# EAGLE board big (EAGLE 6.4)
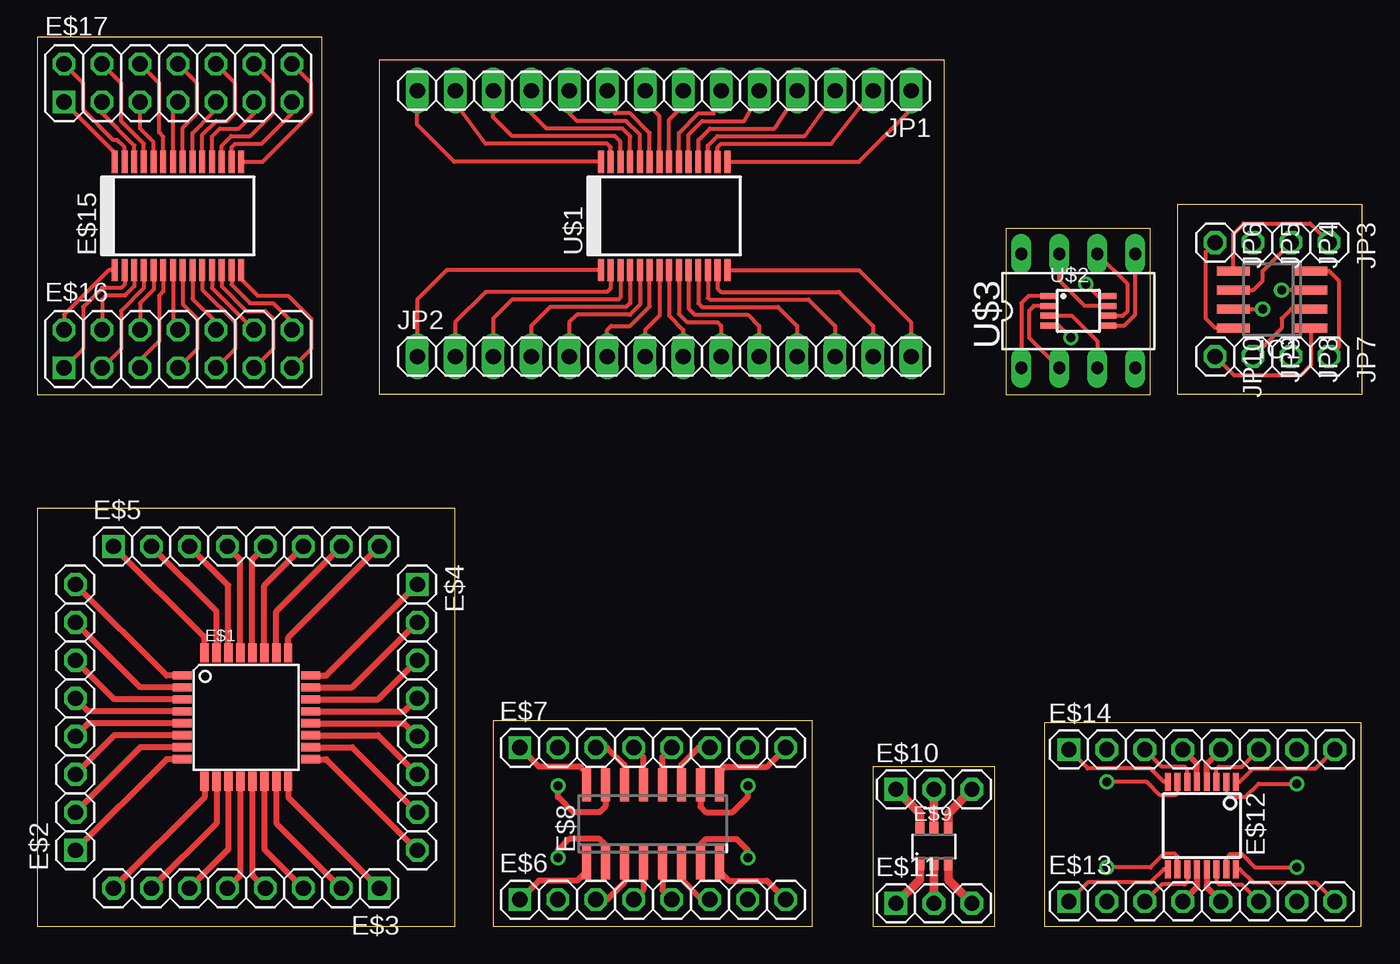
[diagram p0: board, top side]
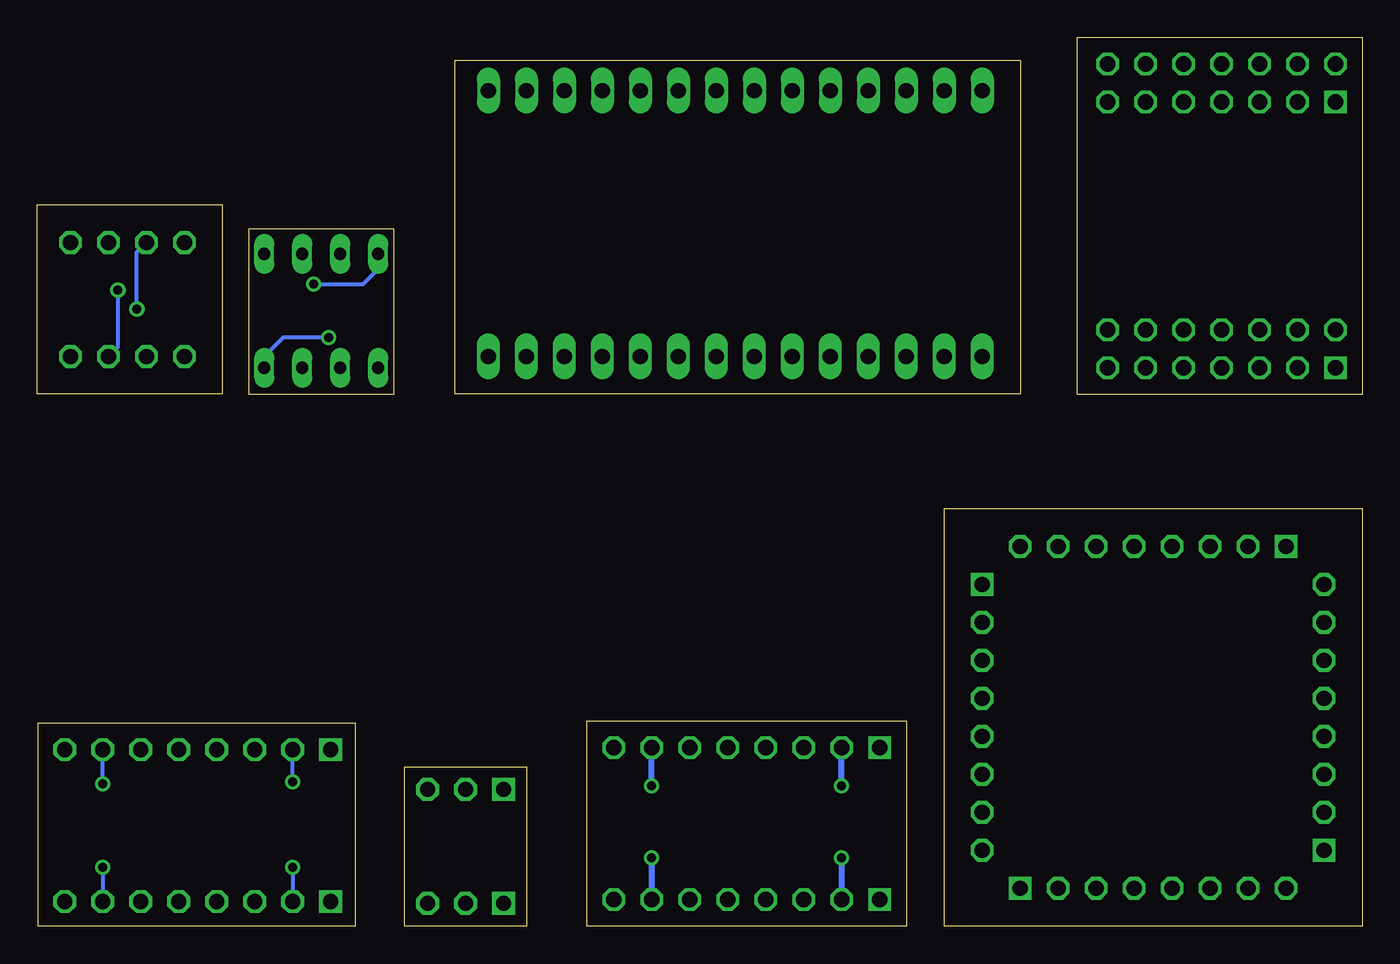
[diagram p1: board, bottom side, seen from below]

Size 88.57 x 59.44 mm. Coordinates in mm from the lower left corner, seen from the top.
Outline: 0,0 27.94,0 27.94,27.94 0,27.94 0,0
Outline: 30.48,0 51.82,0 51.82,13.72 30.48,13.72 30.48,0
Outline: 55.88,0 64.01,0 64.01,10.67 55.88,10.67 55.88,0
Outline: 67.31,0 88.52,0 88.52,13.59 67.31,13.59 67.31,0
Outline: 0,35.56 19.05,35.56 19.05,59.44 0,59.44 0,35.56
Outline: 22.86,57.91 22.86,35.58 60.63,35.58 60.63,57.91 22.86,57.91
Outline: 64.77,35.56 74.4,35.56 74.4,46.66 64.77,46.66 64.77,35.56
Outline: 76.2,48.26 76.2,35.58 88.57,35.58 88.57,48.26 76.2,48.26
Copper layers (1*16): Top 0.035mm / dielectric 1.5mm / Bottom 0.035mm
Design rules "default": minimum track width 10mil, minimum drill 24mil, track to track 8mil, track to pad 8mil, pad to pad 8mil, via to via 8mil, smd to smd 8mil, copper to edge 40mil, drill to drill 8mil, minimum pad ring 10mil, minimum via ring 8mil, stop-mask expansion 4mil, vias tented up to drill 0mil, thermal gap 10mil

## Footprints (pad centres in the part's own frame; a part is rotated, then mirrored left to right if it is on the bottom)
TQFP32-08 = smd 1.27 x 0.559: 1 -4.293,2.8; 2 -4.293,2; 3 -4.293,1.2; 4 -4.293,0.4; 5 -4.293,-0.4; 6 -4.293,-1.2; 7 -4.293,-2; 8 -4.293,-2.8; 17 4.293,-2.8; 18 4.293,-2; 19 4.293,-1.2; 20 4.293,-0.4; 21 4.293,0.4; 22 4.293,1.2; 23 4.293,2; 24 4.293,2.8 | smd 0.559 x 1.27: 9 -2.8,-4.293; 10 -2,-4.293; 11 -1.2,-4.293; 12 -0.4,-4.293; 13 0.4,-4.293; 14 1.2,-4.293; 15 2,-4.293; 16 2.8,-4.293; 25 2.8,4.293; 26 2,4.293; 27 1.2,4.293; 28 0.4,4.293; 29 -0.4,4.293; 30 -1.2,4.293; 31 -2,4.293; 32 -2.8,4.293
1X08-S = drill 1.016 square: 1 -8.89,0 | drill 1.016 octagon: 2 -6.35,0; 3 -3.81,0; 4 -1.27,0; 5 1.27,0; 6 3.81,0; 7 6.35,0; 8 8.89,0
SO-16 = smd 0.6 x 2.2: 1 -4.445,-2.917; 2 -3.175,-2.917; 3 -1.905,-2.917; 4 -0.635,-2.917; 5 0.635,-2.917; 6 1.905,-2.917; 7 3.175,-2.917; 8 4.445,-2.917; 9 4.445,2.283; 10 3.175,2.283; 11 1.905,2.283; 12 0.635,2.283; 13 -0.635,2.283; 14 -1.905,2.283; 15 -3.175,2.283; 16 -4.445,2.283
SOT23-6 = smd 0.6 x 0.9: 1 -0.95,-1.15; 2 0,-1.15; 3 0.95,-1.15; 4 0.95,1.15; 5 0,1.15; 6 -0.95,1.15
1X03-S = drill 1.016 square: 1 -2.54,0 | drill 1.016 octagon: 2 0,0; 3 2.54,0
SSOP16 = smd 0.4 x 1.2: 1 -2.275,-2.925; 2 -1.625,-2.925; 3 -0.975,-2.925; 4 -0.325,-2.925; 5 0.325,-2.925; 6 0.975,-2.925; 7 1.625,-2.925; 8 2.275,-2.925; 9 2.275,2.925; 10 1.625,2.925; 11 0.975,2.925; 12 0.325,2.925; 13 -0.325,2.925; 14 -0.975,2.925; 15 -1.625,2.925; 16 -2.275,2.925
SSOP28 = smd 0.4 x 1.5: 1 -4.225,-3.625; 2 -3.575,-3.625; 3 -2.925,-3.625; 4 -2.275,-3.625; 5 -1.625,-3.625; 6 -0.975,-3.625; 7 -0.325,-3.625; 8 0.325,-3.625; 9 0.975,-3.625; 10 1.625,-3.625; 11 2.275,-3.625; 12 2.925,-3.625; 13 3.575,-3.625; 14 4.225,-3.625; 15 4.225,3.625; 16 3.575,3.625; 17 2.925,3.625; 18 2.275,3.625; 19 1.625,3.625; 20 0.975,3.625; 21 0.325,3.625; 22 -0.325,3.625; 23 -0.975,3.625; 24 -1.625,3.625; 25 -2.275,3.625; 26 -2.925,3.625; 27 -3.575,3.625; 28 -4.225,3.625
2X07 = drill 1.016 square: 1 -7.62,-1.27 | drill 1.016 octagon: 2 -7.62,1.27; 3 -5.08,-1.27; 4 -5.08,1.27; 5 -2.54,-1.27; 6 -2.54,1.27; 7 0,-1.27; 8 0,1.27; 9 2.54,-1.27; 10 2.54,1.27; 11 5.08,-1.27; 12 5.08,1.27; 13 7.62,-1.27; 14 7.62,1.27
SO08 = smd 0.6 x 2.2: 1 -1.905,-2.6; 2 -0.635,-2.6; 3 0.635,-2.6; 4 1.905,-2.6; 5 1.905,2.6; 6 0.635,2.6; 7 -0.635,2.6; 8 -1.905,2.6
1X14 = drill 1.016 long: 1 -16.51,0; 2 -13.97,0; 3 -11.43,0; 4 -8.89,0; 5 -6.35,0; 6 -3.81,0; 7 -1.27,0; 8 1.27,0; 9 3.81,0; 10 6.35,0; 11 8.89,0; 12 11.43,0; 13 13.97,0; 14 16.51,0
1X01 = drill 1.016 octagon: 1 0,0
MSOP8 = smd 0.4 x 1: 1 -0.975,-2.05; 2 -0.325,-2.05; 3 0.325,-2.05; 4 0.975,-2.05; 5 0.975,2.05; 6 0.325,2.05; 7 -0.325,2.05; 8 -0.975,2.05
DIL8 = drill 0.813 long: 1 -3.81,-3.81; 2 -1.27,-3.81; 3 1.27,-3.81; 4 3.81,-3.81; 5 3.81,3.81; 6 1.27,3.81; 7 -1.27,3.81; 8 -3.81,3.81

## Placement (x,y rotation side)
E$1  [TQFP32-08]  13.97,13.97 0 top
E$2  [1X08-S]  2.54,13.97 90 top
E$3  [1X08-S]  13.97,2.54 180 top
E$4  [1X08-S]  25.4,13.97 270 top
E$5  [1X08-S]  13.97,25.4 0 top
E$6  [1X08-S]  41.15,1.78 0 top
E$7  [1X08-S]  41.15,11.94 0 top
E$8  [SO-16]  41.15,7.16 0 top
E$9  [SOT23-6]  59.94,5.33 0 top
E$10  [1X03-S]  59.94,9.14 0 top
E$11  [1X03-S]  59.94,1.52 0 top
E$12  [SSOP16]  77.85,6.73 180 top
E$13  [1X08-S]  77.85,1.65 0 top
E$14  [1X08-S]  77.85,11.81 0 top
E$15  [SSOP28]  9.4,47.5 0 top
E$16  [2X07]  9.4,38.61 0 top
E$17  [2X07]  9.4,56.39 0 top
IC1  UA741D  [SO08]  82.55,41.91 90 top
JP1  [1X14]  41.91,55.88 180 top
JP2  [1X14]  41.91,38.1 0 top
JP3  [1X01]  86.36,45.72 270 top
JP4  [1X01]  83.82,45.72 270 top
JP5  [1X01]  81.28,45.72 270 top
JP6  [1X01]  78.74,45.72 270 top
JP7  [1X01]  86.36,38.1 270 top
JP8  [1X01]  83.82,38.1 270 top
JP9  [1X01]  81.28,38.1 270 top
JP10  [1X01]  78.74,38.1 270 top
U$1  PIC18F26K20-SSOP  [SSOP28]  41.91,47.5 0 top
U$2  MCP3202-MSOP  [MSOP8]  69.6,41.15 270 top
U$3  MCP3202  [DIL8]  69.6,41.15 0 top

## Library data of the parts
E$1 = ref-packages-longpad
E$2-E$7 E$10 E$11 E$13 E$14 E$16 E$17 = pinhead-2
E$8 E$9 E$12 E$15 = _mcom4e
IC1 = linear
JP1-JP10 = pinhead
U$1-U$3 = _mcom3

## Nets
N$1: JP2.11 U$1.11
N$2: JP2.8 U$1.8
N$3: JP2.9 U$1.9
N$4: JP2.10 U$1.10
N$5: JP1.7 U$1.21
N$6: JP1.8 U$1.22
N$7: JP1.9 U$1.23
N$8: JP1.10 U$1.24
N$9: JP1.11 U$1.25
N$10: JP1.12 U$1.26
N$11: JP1.13 U$1.27
N$12: JP1.14 U$1.28
N$13: JP2.2 U$1.2
N$14: JP2.3 U$1.3
N$15: JP2.4 U$1.4
N$16: JP2.5 U$1.5
N$17: JP2.6 U$1.6
N$18: JP2.7 U$1.7
N$19: JP2.12 U$1.12
N$20: JP2.13 U$1.13
N$21: JP2.14 U$1.14
N$22: JP1.1 U$1.15
N$23: JP1.2 U$1.16
N$24: JP1.3 U$1.17
N$25: JP2.1 U$1.1
N$26: JP1.4 U$1.18
N$27: JP1.5 U$1.19
N$28: JP1.6 U$1.20
N$29: U$2.2 U$3.2
N$30: U$2.6 U$3.6
N$31: U$2.8 U$3.8
N$32: U$2.7 U$3.7
N$33: U$2.4 U$3.4
N$34: U$2.3 U$3.3
N$35: U$2.5 U$3.5
N$36: U$2.1 U$3.1
N$37: IC1.1 JP10.1
N$38: IC1.2 JP9.1
N$39: IC1.3 JP8.1
N$40: IC1.4 JP7.1
N$41: IC1.5 JP3.1
N$42: IC1.6 JP4.1
N$43: IC1.7 JP5.1
N$44: IC1.8 JP6.1
S$1: E$1.1 E$2.8
S$2: E$1.2 E$2.7
S$3: E$1.3 E$2.6
S$4: E$1.4 E$2.5
S$5: E$1.5 E$2.4
S$6: E$1.6 E$2.3
S$7: E$1.7 E$2.2
S$8: E$1.8 E$2.1
S$9: E$1.9 E$3.8
S$10: E$1.10 E$3.7
S$11: E$1.11 E$3.6
S$12: E$1.12 E$3.5
S$13: E$1.13 E$3.4
S$14: E$1.14 E$3.3
S$15: E$1.15 E$3.2
S$16: E$1.16 E$3.1
S$17: E$1.17 E$4.8
S$18: E$1.18 E$4.7
S$19: E$1.19 E$4.6
S$20: E$1.20 E$4.5
S$21: E$1.21 E$4.4
S$22: E$1.22 E$4.3
S$23: E$1.23 E$4.2
S$24: E$1.24 E$4.1
S$25: E$1.25 E$5.8
S$26: E$1.26 E$5.7
S$27: E$1.27 E$5.6
S$28: E$1.28 E$5.5
S$29: E$1.29 E$5.4
S$30: E$1.30 E$5.3
S$31: E$1.31 E$5.2
S$32: E$1.32 E$5.1
S$33: E$6.1 E$8.1
S$34: E$6.2 E$8.2
S$35: E$6.3 E$8.3
S$36: E$6.4 E$8.4
S$37: E$6.5 E$8.5
S$38: E$6.6 E$8.6
S$39: E$6.7 E$8.7
S$40: E$6.8 E$8.8
S$41: E$7.1 E$8.16
S$42: E$7.2 E$8.15
S$43: E$7.3 E$8.14
S$44: E$7.4 E$8.13
S$45: E$7.5 E$8.12
S$46: E$7.6 E$8.11
S$47: E$7.7 E$8.10
S$48: E$7.8 E$8.9
S$49: E$9.1 E$11.1
S$50: E$9.2 E$11.2
S$51: E$9.3 E$11.3
S$52: E$9.6 E$10.1
S$53: E$9.5 E$10.2
S$54: E$9.4 E$10.3
S$55: E$12.9 E$13.1
S$56: E$12.10 E$13.2
S$57: E$12.11 E$13.3
S$58: E$12.12 E$13.4
S$59: E$12.13 E$13.5
S$60: E$12.14 E$13.6
S$61: E$12.15 E$13.7
S$62: E$12.16 E$13.8
S$63: E$12.8 E$14.1
S$64: E$12.7 E$14.2
S$65: E$12.6 E$14.3
S$66: E$12.5 E$14.4
S$67: E$12.4 E$14.5
S$68: E$12.3 E$14.6
S$69: E$12.2 E$14.7
S$70: E$12.1 E$14.8
S$71: E$15.1 E$16.2
S$72: E$15.2 E$16.1
S$73: E$15.3 E$16.4
S$74: E$15.4 E$16.3
S$75: E$15.5 E$16.6
S$76: E$15.6 E$16.5
S$77: E$15.7 E$16.8
S$78: E$15.8 E$16.7
S$79: E$15.9 E$16.10
S$80: E$15.10 E$16.9
S$81: E$15.11 E$16.12
S$82: E$15.12 E$16.11
S$83: E$15.13 E$16.14
S$84: E$15.14 E$16.13
S$85: E$15.28 E$17.1
S$86: E$15.27 E$17.2
S$87: E$15.26 E$17.3
S$88: E$15.25 E$17.4
S$89: E$15.24 E$17.5
S$90: E$15.23 E$17.6
S$91: E$15.22 E$17.7
S$92: E$15.21 E$17.8
S$93: E$15.20 E$17.9
S$94: E$15.19 E$17.10
S$95: E$15.18 E$17.11
S$96: E$15.17 E$17.12
S$97: E$15.16 E$17.13
S$98: E$15.15 E$17.14

## Tracks (layer width: path | path; a pad name or v marks a point on that pad's centre or on a via)
N$1
  Top 0.254: U$1.11 44.19,41.67 44.45,41.4 49.53,41.4 50.8,40.13 JP2.11
N$2
  Top 0.254: U$1.8 42.23,40.82 43.18,39.88 JP2.8
N$3
  Top 0.254: U$1.9 42.88,40.94 43.43,40.39 45.47,40.39 45.72,40.13 JP2.9
N$4
  Top 0.254: U$1.10 43.53,41.3 43.94,40.89 47.5,40.89 48.26,40.13 JP2.10
N$5
  Top 0.254: U$1.21 42.23,53.92 43.18,54.86 JP1.7
N$6
  Top 0.254: U$1.22 41.59,54.17 40.64,55.12 JP1.8
N$7
  Top 0.254: U$1.23 40.94,53.05 39.62,54.36 38.61,54.36 38.1,55.63 JP1.9
N$8
  Top 0.254: U$1.24 40.28,52.93 39.37,53.85 36.07,53.85 35.56,54.36 JP1.10
N$9
  Top 0.254: U$1.25 39.63,52.82 39.12,53.34 34.04,53.34 33.02,54.36 JP1.11
N$10
  Top 0.254: U$1.26 38.98,52.45 38.61,52.83 31.75,52.83 30.48,54.1 JP1.12
N$11
  Top 0.254: U$1.27 38.34,52.09 38.1,52.32 29.97,52.32 27.94,55.12 JP1.13
N$12
  Top 0.254: U$1.28 27.87,51.12 25.4,53.59 JP1.14
N$13
  Top 0.254: U$1.2 38.34,42.65 38.1,42.42 29.97,42.42 27.94,40.39 JP2.2
N$14
  Top 0.254: U$1.3 38.98,42.03 38.86,41.91 31.75,41.91 30.48,40.64 JP2.3
N$15
  Top 0.254: U$1.4 39.63,41.67 39.37,41.4 34.29,41.4 33.02,40.13 JP2.4
N$16
  Top 0.254: U$1.5 40.28,41.55 39.62,40.89 36.07,40.89 35.56,40.39 JP2.5
N$17
  Top 0.254: U$1.6 40.94,41.44 39.62,40.13 38.35,40.13 38.1,39.88 JP2.6
N$18
  Top 0.254: U$1.7 41.59,40.82 40.64,39.88 JP2.7
N$19
  Top 0.254: U$1.12 44.84,42.03 44.96,41.91 51.56,41.91 53.34,40.13 JP2.12
N$20
  Top 0.254: U$1.13 45.48,42.65 45.72,42.42 53.59,42.42 55.88,40.13 JP2.13
N$21
  Top 0.254: U$1.14 54.93,43.87 58.42,40.39 JP2.14
N$22
  Top 0.254: U$1.15 54.93,51.12 58.42,54.61 JP1.1
N$23
  Top 0.254: U$1.16 45.48,52.09 45.72,52.32 53.09,52.32 JP1.2
N$24
  Top 0.254: U$1.17 44.84,52.2 45.47,52.83 51.31,52.83 53.34,55.63 JP1.3
N$25
  Top 0.254: U$1.1 27.36,43.87 25.4,41.91 JP2.1
N$26
  Top 0.254: U$1.18 44.19,52.57 44.96,53.34 49.28,53.34 50.8,55.63 JP1.4
N$27
  Top 0.254: U$1.19 43.53,52.93 44.45,53.85 47.24,53.85 48.26,55.63 JP1.5
N$28
  Top 0.254: U$1.20 42.88,53.05 44.2,54.36 45.21,54.36 45.72,55.63 JP1.6
N$29
  Top 0.254: U$2.2 66.62,41.47 66.29,41.15 66.29,39.37 U$3.2
N$30
  Top 0.254: U$2.6 72.57,40.82 72.9,41.15 72.9,42.93 U$3.6
N$31  (via drill 0.6)
  Top 0.254: U$2.8 70.91,42.12 v70.1,42.93
  Bottom 0.254: v70.1,42.93 66.8,42.93 65.79,43.94 U$3.8
N$32
  Top 0.254: U$2.7 70.03,41.47 68.33,43.18 U$3.7
N$33  (via drill 0.6)
  Top 0.254: U$2.4 68.28,40.17 v69.09,39.37
  Bottom 0.254: v69.09,39.37 72.14,39.37 73.41,38.1 U$3.4
N$34
  Top 0.254: U$2.3 69.16,40.82 70.87,39.12 U$3.3
N$35
  Top 0.254: U$2.5 72.69,40.17 73.41,40.89 U$3.5
N$36
  Top 0.254: U$2.1 66.25,42.12 65.79,41.66 U$3.1
N$37
  Top 0.254: IC1.1 85.15,37.52 84.45,36.83 80.01,36.83 JP10.1
N$38
  Top 0.254: IC1.2 83.82,41.27 83.19,40.64 83.19,40.01 JP9.1
N$39  (via drill 0.6)
  Top 0.254: IC1.3 v83.19,42.55
  Bottom 0.254: v83.19,42.55 83.19,38.73 JP8.1
N$40
  Top 0.254: IC1.4 86.36,43.81 87,43.18 87,38.73 JP7.1
N$41
  Top 0.254: IC1.5 79.95,46.3 80.64,46.99 85.09,46.99 JP3.1
N$42
  Top 0.254: IC1.6 81.28,42.55 81.92,43.18 81.92,43.81 JP4.1
N$43  (via drill 0.6)
  Top 0.254: IC1.7 v81.92,41.27
  Bottom 0.254: v81.92,41.27 81.92,45.09 JP5.1
N$44
  Top 0.254: IC1.8 78.74,40.01 78.11,40.64 78.11,45.09 JP6.1
S$1
  Top 0.406: E$1.1 8.63,16.77 E$2.8
S$2
  Top 0.406: E$1.2 6.89,15.97 E$2.7
S$3
  Top 0.406: E$1.3 5.15,15.17 E$2.6
S$4
  Top 0.406: E$1.4 3.41,14.37 E$2.5
S$5
  Top 0.406: E$1.5 3.41,13.57 E$2.4
S$6
  Top 0.406: E$1.6 5.15,12.77 E$2.3
S$7
  Top 0.406: E$1.7 6.89,11.97 E$2.2
S$8
  Top 0.406: E$1.8 8.63,11.17 E$2.1
S$9
  Top 0.406: E$1.9 11.17,8.63 E$3.8
S$10
  Top 0.406: E$1.10 11.97,6.89 E$3.7
S$11
  Top 0.406: E$1.11 12.77,5.15 E$3.6
S$12
  Top 0.406: E$1.12 13.57,3.41 E$3.5
S$13
  Top 0.406: E$1.13 14.37,3.41 E$3.4
S$14
  Top 0.406: E$1.14 15.17,5.15 E$3.3
S$15
  Top 0.406: E$1.15 15.97,6.89 E$3.2
S$16
  Top 0.406: E$1.16 16.77,8.63 E$3.1
S$17
  Top 0.406: E$1.17 19.31,11.17 E$4.8
S$18
  Top 0.406: E$1.18 21.05,11.97 E$4.7
S$19
  Top 0.406: E$1.19 22.79,12.77 E$4.6
S$20
  Top 0.406: E$1.20 24.53,13.57 E$4.5
S$21
  Top 0.406: E$1.21 24.53,14.37 E$4.4
S$22
  Top 0.406: E$1.22 22.79,15.17 E$4.3
S$23
  Top 0.406: E$1.23 21.05,15.97 E$4.2
S$24
  Top 0.406: E$1.24 19.31,16.77 E$4.1
S$25
  Top 0.406: E$1.25 16.77,19.31 E$5.8
S$26
  Top 0.406: E$1.26 15.97,21.05 E$5.7
S$27
  Top 0.406: E$1.27 15.17,22.79 E$5.6
S$28
  Top 0.406: E$1.28 14.37,24.53 E$5.5
S$29
  Top 0.406: E$1.29 13.57,24.53 E$5.4
S$30
  Top 0.406: E$1.30 12.77,22.79 E$5.3
S$31
  Top 0.406: E$1.31 11.97,21.05 E$5.2
S$32
  Top 0.406: E$1.32 11.17,19.31 E$5.1
S$33
  Top 0.406: E$8.1 36.7,3.68 36.07,3.05 33.53,3.05 E$6.1
S$34  (via drill 0.6)
  Top 0.406: E$8.2 37.97,5.46 37.59,5.84 35.56,5.84 34.8,5.08 v34.8,4.57
  Bottom 0.406: v34.8,4.57 E$6.2
S$35
  Top 0.406: E$8.3 39.24,2.92 38.1,1.78 E$6.3
S$36
  Top 0.406: E$8.4 40.51,2.41 E$6.4
S$37
  Top 0.406: E$8.5 41.78,2.41 E$6.5
S$38
  Top 0.406: E$8.6 43.05,3.17 44.45,1.78 E$6.6
S$39  (via drill 0.6)
  Top 0.406: E$8.7 44.32,5.46 44.7,5.84 46.74,5.84 47.5,5.08 v47.5,4.57
  Bottom 0.406: v47.5,4.57 E$6.7
S$40
  Top 0.406: E$8.8 45.59,3.68 46.23,3.05 48.77,3.05 E$6.8
S$41
  Top 0.406: E$8.16 36.7,10.29 36.32,10.67 33.53,10.67 E$7.1
S$42  (via drill 0.6)
  Top 0.406: E$8.15 37.97,8 37.59,7.62 35.81,7.62 34.8,8.64 v34.8,9.4
  Bottom 0.406: v34.8,9.4 E$7.2
S$43
  Top 0.406: E$8.14 39.24,10.79 38.1,11.94 E$7.3
S$44
  Top 0.406: E$8.13 40.51,11.3 E$7.4
S$45
  Top 0.406: E$8.12 41.78,11.3 E$7.5
S$46
  Top 0.406: E$8.11 43.05,10.79 44.2,11.94 E$7.6
S$47  (via drill 0.6)
  Top 0.406: E$8.10 44.32,8 44.7,7.62 46.48,7.62 47.5,8.64 v47.5,9.4
  Bottom 0.406: v47.5,9.4 E$7.7
S$48
  Top 0.406: E$8.9 45.59,10.29 45.97,10.67 48.77,10.67 E$7.8
S$49
  Top 0.559: E$9.1 58.99,3.11 E$11.1
S$50
  Top 0.559: E$9.2 E$11.2
S$51
  Top 0.559: E$9.3 60.89,3.11 E$11.3
S$52
  Top 0.559: E$9.6 58.99,7.55 E$10.1
S$53
  Top 0.559: E$9.5 E$10.2
S$54
  Top 0.559: E$9.4 60.89,7.55 E$10.3
S$55
  Top 0.254: E$12.9 75.31,3.81 74.42,2.92 70.23,2.92 E$13.1
S$56  (via drill 0.6)
  Top 0.254: E$12.10 76.23,4.67 76.07,4.83 75.31,4.83 74.42,3.94 v71.5,3.94
  Bottom 0.254: v71.5,3.94 E$13.2
S$57
  Top 0.254: E$12.11 76.88,2.96 76.71,2.79 75.18,2.79 E$13.3
S$58
  Top 0.406: E$12.12 77.53,2.7 arc-45 77.45,2.52 E$13.4
S$59
  Top 0.406: E$12.13 78.18,2.7 arc45 78.25,2.52 E$13.5
S$60
  Top 0.254: E$12.14 78.83,2.96 78.99,2.79 80.52,2.79 E$13.6
S$61  (via drill 0.6)
  Top 0.254: E$12.15 79.48,4.55 79.76,4.83 80.52,4.83 81.41,3.94 v84.2,3.94
  Bottom 0.254: v84.2,3.94 E$13.7
S$62
  Top 0.254: E$12.16 80.39,3.81 81.28,2.92 85.47,2.92 E$13.8
S$63
  Top 0.254: E$12.8 75.31,9.66 74.42,10.54 70.23,10.54 E$14.1
S$64  (via drill 0.6)
  Top 0.254: E$12.7 76.23,8.92 76.07,8.76 75.06,8.76 74.17,9.65 v71.5,9.65
  Bottom 0.254: v71.5,9.65 E$14.2
S$65
  Top 0.254: E$12.6 76.88,10.5 76.71,10.67 75.18,10.67 E$14.3
S$66
  Top 0.406: E$12.5 77.53,10.87 E$14.4
S$67
  Top 0.406: E$12.4 78.18,10.87 E$14.5
S$68
  Top 0.254: E$12.3 78.83,10.5 78.99,10.67 80.52,10.67 E$14.6
S$69  (via drill 0.6)
  Top 0.254: E$12.2 79.48,8.92 79.76,8.64 80.77,8.64 81.66,9.53 v84.2,9.53
  Bottom 0.254: v84.2,9.53 E$14.7
S$70
  Top 0.254: E$12.1 80.39,9.66 81.28,10.54 85.47,10.54 E$14.8
S$71
  Top 0.254: E$15.1 4.76,43.87 1.78,40.89 E$16.2
S$72
  Top 0.254: E$15.2 5.82,42.91 5.59,42.67 4.32,42.67 3.05,41.4 3.05,38.61 E$16.1
S$73
  Top 0.254: E$15.3 6.47,42.8 5.84,42.16 4.57,42.16 4.32,41.91 E$16.4
S$74
  Top 0.254: E$15.4 7.12,42.68 5.59,41.15 5.59,38.61 E$16.3
S$75
  Top 0.254: E$15.5 7.77,42.57 6.86,41.66 E$16.6
S$76
  Top 0.254: E$15.6 8.42,42.46 8.13,42.16 8.13,39.12 6.86,37.85 E$16.5
S$77
  Top 0.254: E$15.7 9.07,40.2 E$16.8
S$78
  Top 0.254: E$15.8 9.72,41.59 10.67,40.64 10.67,38.61 E$16.7
S$79
  Top 0.254: E$15.9 10.37,41.95 11.94,40.39 E$16.10
S$80
  Top 0.254: E$15.10 11.02,42.57 13.21,40.39 13.21,38.61 E$16.9
S$81
  Top 0.254: E$15.11 11.67,42.68 E$16.12
S$82
  Top 0.254: E$15.12 12.32,42.8 13.97,41.15 15.24,41.15 15.75,40.64 15.75,38.61 E$16.11
S$83
  Top 0.254: E$15.13 12.97,42.91 14.22,41.66 15.75,41.66 17.02,40.39 E$16.14
S$84
  Top 0.254: E$15.14 13.62,43.27 14.73,42.16 16.76,42.16 18.29,40.64 18.29,38.61 E$16.13
S$85
  Top 0.254: E$15.28 5.17,51.72 E$17.1
S$86
  Top 0.254: E$15.27 5.82,52.09 5.33,52.58 5.08,52.58 3.05,54.61 3.05,56.39 E$17.2
S$87
  Top 0.254: E$15.26 6.47,52.2 4.32,54.36 E$17.3
S$88
  Top 0.254: E$15.25 7.12,52.31 5.59,53.85 5.59,56.39 E$17.4
S$89
  Top 0.254: E$15.24 7.77,52.42 6.86,53.34 E$17.5
S$90
  Top 0.254: E$15.23 8.42,52.79 8.13,53.09 8.13,56.39 E$17.6
S$91
  Top 0.254: E$15.22 9.07,54.79 E$17.7
S$92
  Top 0.254: E$15.21 9.72,53.41 10.67,54.36 10.67,56.39 E$17.8
S$93
  Top 0.254: E$15.20 10.37,53.05 11.68,54.36 11.68,54.86 E$17.9
S$94
  Top 0.254: E$15.19 11.02,52.93 11.94,53.85 12.7,53.85 13.21,54.36 13.21,56.39 E$17.10
S$95
  Top 0.254: E$15.18 11.67,52.82 12.19,53.34 13.46,53.34 14.48,54.36 E$17.11
S$96
  Top 0.254: E$15.17 12.32,52.2 12.95,52.83 14.22,52.83 15.75,54.36 15.75,56.39 E$17.12
S$97
  Top 0.254: E$15.16 12.97,52.09 13.21,52.32 14.99,52.32 17.02,54.36 E$17.13
S$98
  Top 0.254: E$15.15 15.05,51.12 18.29,54.36 18.29,56.39 E$17.14

## Text on the board
Document: SSOP28 | SSOP28 | MSOP8 | SOIC8 | TQFP32 | SOIC16 | SOT23-6 | SSOP20